# Altium PCB Motoransteuerung_v2.PcbDoc
Units mm, origin at the board's own origin, x right, y up, seen from the top; angles counter-clockwise.
Board outline 78.49 x 52.83 mm, 2 copper layers (Top Layer, Bottom Layer); 17 components, 11 nets, 48 pads, 0 vias.
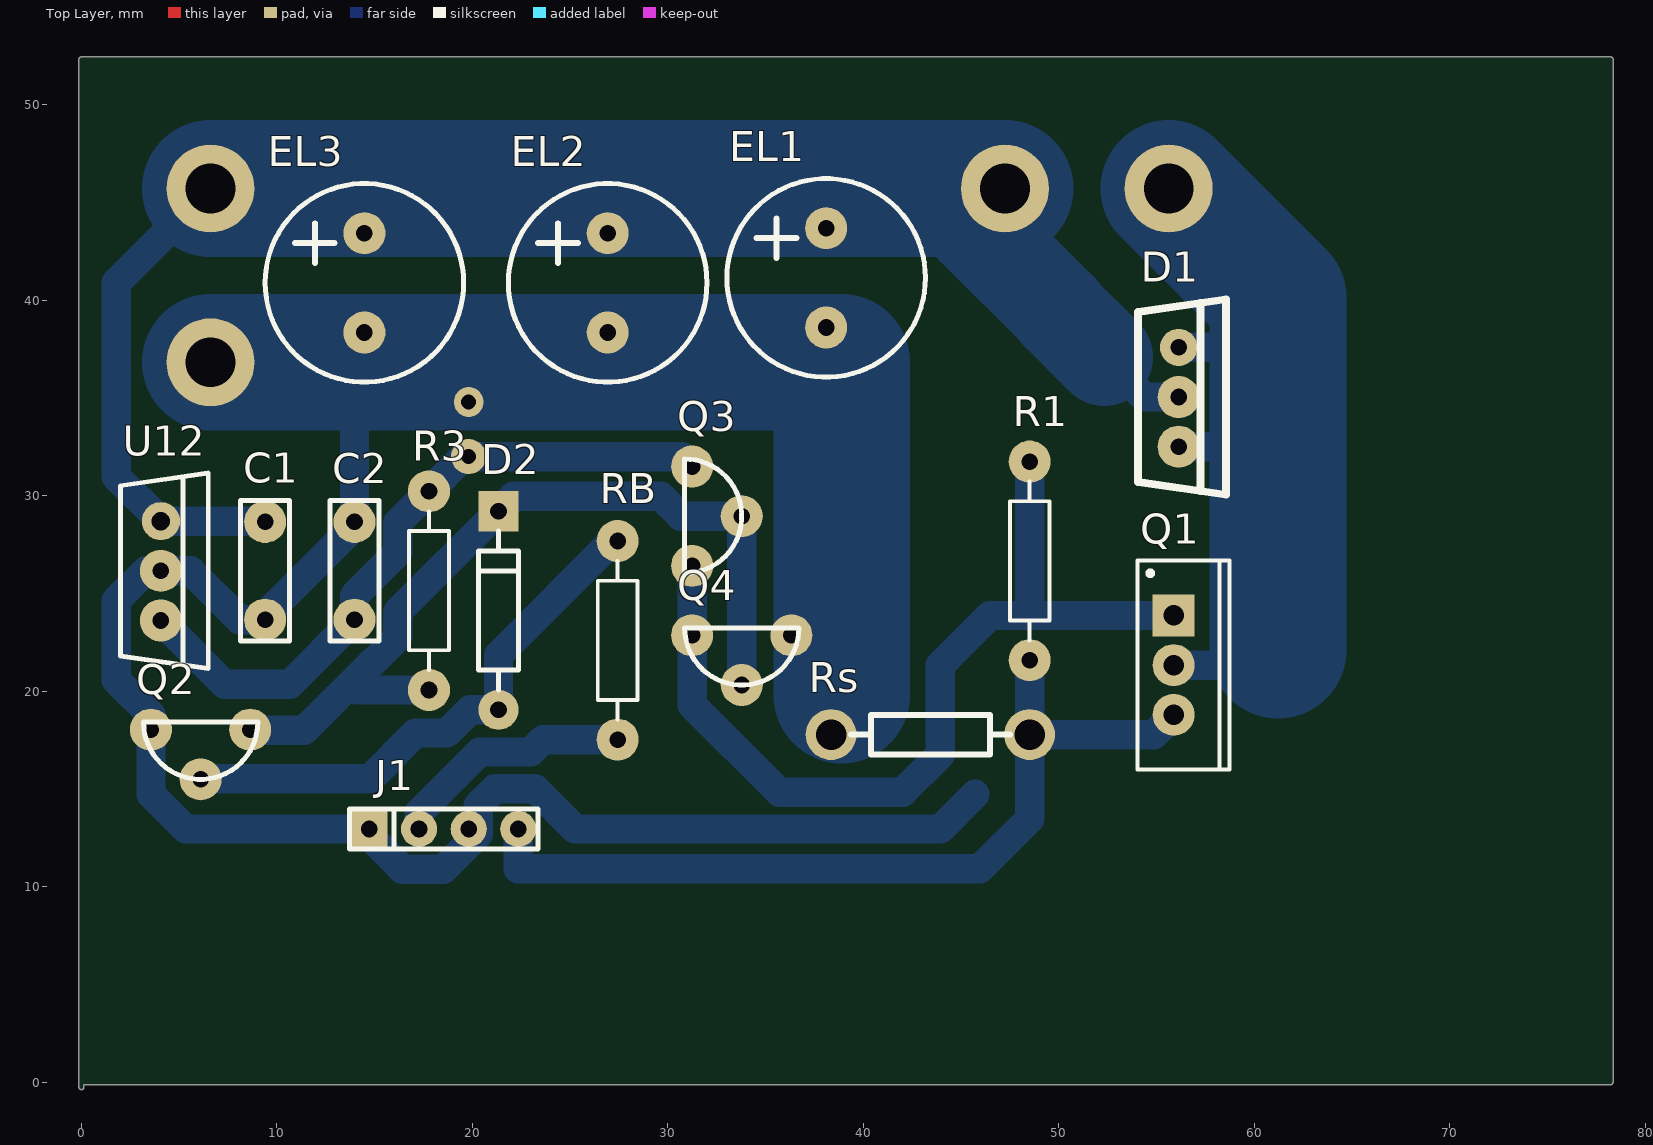
[diagram p0: Top Layer view]
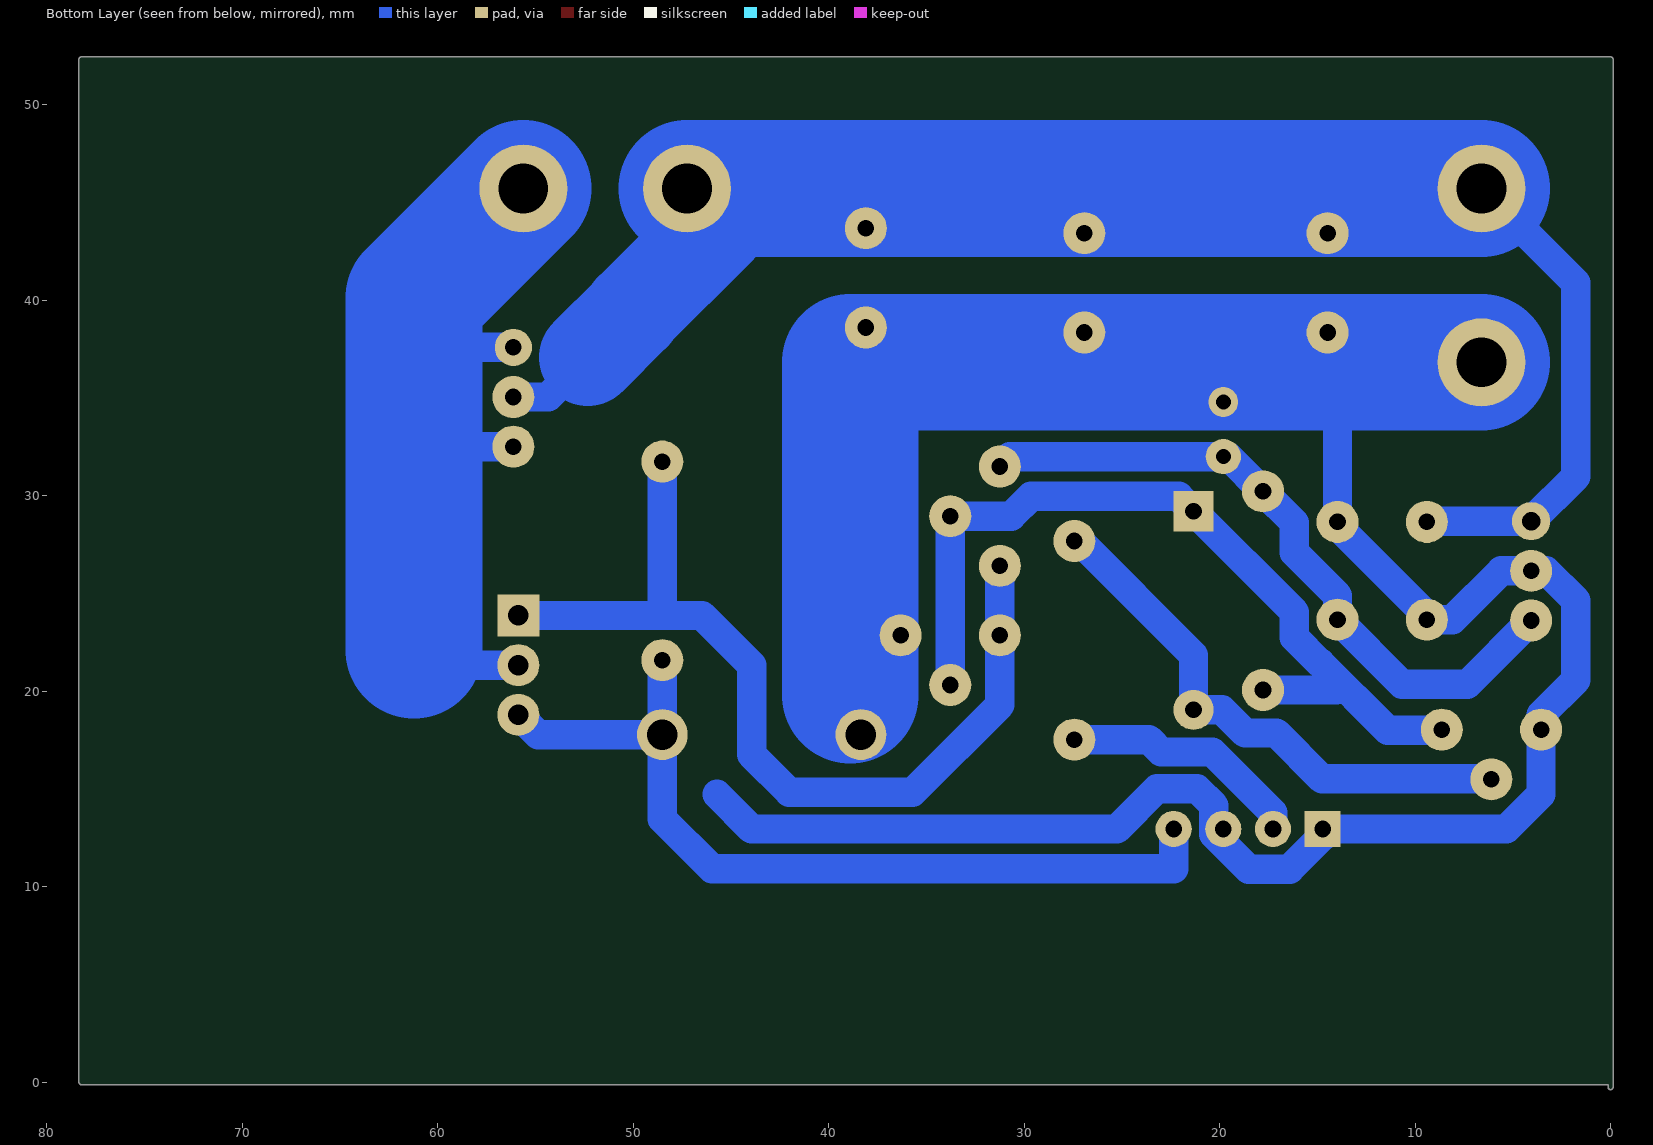
[diagram p1: Bottom Layer view, seen from below]

## Layer stack, top to bottom
Top Solder: solder mask 0.0102, Solder Resist, Dk 3.5
Top Layer: signal copper 0.0356
Dielectric1: dielectric 0.32, FR-4, Dk 4.8
Bottom Layer: signal copper 0.0356
Bottom Solder: solder mask 0.0102, Solder Resist, Dk 3.5

## Board outline
-0.127,-0.254 -0.127,52.324 cw(c0,52.324) 0,52.451 78.232,52.451 cw(c78.232,52.324) 78.359,52.324 78.359,0 cw(c78.232,0) 78.232,-0.127 0.127,-0.127 0.127,-0.254 cw(c0,-0.254)

## Design rules (kind name [scope] priority, off if disabled: settings)
Clearance Clearance_1 [Inpolygon vs Inpolygon] p1: gap=0.75 ignorepadtopadclearanceinfootprint=FALSE except(0: Arc-Hole Track-Hole SMDPad-Hole THPad-Hole Via-Hole Fill-Hole Poly-Hole Region-Hole Text-Hole)
Clearance [All] p2: gap=0.38 ignorepadtopadclearanceinfootprint=FALSE except(0: Arc-Hole Track-Hole SMDPad-Hole THPad-Hole Via-Hole Fill-Hole Poly-Hole Region-Hole Text-Hole)
HoleSize [All] p1: absolutevalues=TRUE maxlimit=2160.256 minlimit=0.75 maxpercent=80.000 minpercent=20.000
MinimumAnnularRing [All] p1: minimumring=0.5
PolygonConnect [All] p1: connectstyle=Relief reliefconductorwidth=0.5 reliefentries=4 polygonreliefangle="90 Angle" airgapwidth=0.254
RoutingVias [All] p1: holewidth=0.85 width=1.85 viastyle="Through Hole" minholewidth=0.75 minwidth=1.75 maxholewidth=0.95 maxwidth=1.95
SolderMaskExpansion [All] p1: expansion=0.102
Width [All] p1: maxlimit=10 minlimit=0.38 preferedwidth=1.5
29 further rules are at their usual default settings.

## Classes and differential pairs
component class Motoransteurung: C1 C2 D2 EL1 J1 Q2 Q3 Q4 R3 RB Rs U12

## Components (designator, comment, footprint, x,y, rotation, side; value= is the part's Value field where it differs from the comment)
C1 "KO" rad-7.2/2.5/5 9.398,26.162 r270 top value=330nF
C2 "KO" rad-7.2/2.5/5 13.97,26.162 r90 top value=100nF
D1 "Schottky" TO-220V#1 56.134,35.052 r270 top
D2 "D Schottky" DIODE-0.4/085 21.336,24.13 r90 top
EL1 "ELKO" RB-.2/.4 38.1,41.148 r90 top
EL2 "ELKO" RB-.2/.4 26.924,40.894 r90 top (schematic designator EL1)
EL3 "ELKO" RB-.2/.4 14.478,40.894 r90 top (schematic designator EL1)
J1 "CON4" Sip-4 18.542,12.954 r0 top
Q1 "IRFZ34N" TO-220AB 55.88,21.336 r270 top
Q2 "BC548" TO-92/EBC 6.096,18.034 r180 top
Q3 "BC548" TO-92/EBC 31.242,28.956 r270 top
Q4 "BC558" TO-92/EBC 33.782,22.86 r180 top
R1 "RES" Axial-0.4#1 48.514,26.67 r270 top value=100K
R3 "Res2" AXIAL-0.4 17.78,25.146 r90 top value=470
RB "Res2" AXIAL-0.4 27.432,22.606 r270 top value=220
Rs "RES" Axial-0.4#2 43.434,17.78 r0 top value=0.039
U12 "7812" TO-220V#2 4.064,26.162 r270 top

## Footprints (in the part's own frame and the unit in brackets; to place one, negate y for a bottom-side part, rotate by r counter-clockwise, add the part's x,y. Pads: shape width x height; smd on the part's side, far side on the other; paste and mask are expansions set on the pad)
Axial-0.4#1 [mm] "Axial Device, Thru-Hole; 2 Leads; 0.4 in Pin Spacing"
  round 2.15 hole 0.85: 1(-5.08,0) 2(5.08,0)
  silkscreen extent -4.06,-1.02 4.06,1.02
Axial-0.4#2 [mm]
  round 2.6 hole 1.55: 1(-5.08,0) 2(5.08,0)
  silkscreen extent -4.06,-1.02 4.06,1.02
AXIAL-0.4 [mm] "Axial Device, Thru-Hole; 2 Leads; 0.4 in Pin Spacing"
  round 2.15 hole 0.85: 1(-5.08,0) 2(5.08,0)
  silkscreen extent -4.06,-1.02 4.06,1.02
DIODE-0.4/085 [mm]
  round 2.05 hole 0.85: 1(-5.08,0)
  rect 2.05x2.05 hole 0.85: 2(5.08,0)
  silkscreen extent -4.06,-1.02 4.06,1.02
rad-7.2/2.5/5 [mm]
  round 2.15 hole 0.85: 1(-2.5,0) 2(2.5,0)
  silkscreen extent -3.6,-1.25 3.6,1.25
RB-.2/.4 [mm]
  round 2.15 hole 0.85: 1(2.54,0) 2(-2.54,0)
  silkscreen extent -5.08,-5.08 5.08,5.08
Sip-4 [mm]
  rect 1.85x1.85 hole 0.85: 1(-3.81,0)
  round 1.85 hole 0.85: 2(-1.27,0) 3(1.27,0) 4(3.81,0)
  silkscreen extent -4.83,-1.02 4.83,1.02
TO-92/EBC [mm]
  round 2.15 hole 0.85: 1(0,2.54) 2(2.54,0) 3(-2.54,0)
  silkscreen extent -2.93,-0.38 2.92,2.54
TO-220AB [mm] "TO, Thru-Hole, Vertical, Heatsink Mounted; 3 In-Line Leads; Pitch 2.54 mm"
  rect 2.15x2.15 hole 1.05: 1(-2.54,0)
  round 2.15 hole 1.05: 2(0,0) 3(2.54,0)
  silkscreen extent -5.35,-1.85 5.35,2.85, body extent -5.4,-1.9 5.4,2.9, height 19.3
TO-220V#1 [mm]
  round 1.9 hole 0.85: 1(-2.54,0)
  round 2.15 hole 0.85: 2(2.54,0) 3(0,0)
  silkscreen extent -5,-2.07 5,2.42
TO-220V#2 [mm]
  round 1.95 hole 0.95: 1(-2.54,0)
  round 2.15 hole 0.85: 2(2.54,0) 3(0,0)
  silkscreen extent -5,-2.07 5,2.42

## Part data
C1 C2: "Kondensator"
D2: "Schottky Diode", Code_JEDEC=DO-214-AA, LatestRevisionDate=17-Jul-2002, LatestRevisionNote="Re-released for DXP Platform.", PackageDescription="DO-214-AA/SMB; 2 C-Bend Leads; Body 5.3 x 3.6 mm, inc. leads (LxW)", PackageReference=SMB, Published=8-Jun-2000, Publisher="Altium Limited"
EL1 EL2 EL3: "Elko"
J1: "Stecker"
Q1: "HEXFET Power MOSFET", ComponentLink1Description="Manufacturer Link", ComponentLink1URL=http://www.irf.com/, ComponentLink2Description=Datasheet, ComponentLink2URL=http://www.irf.com/product-info/datasheets/data/irfz34n.pdf, DatasheetVersion=Aug-1997, LatestRevisionDate=17-Jul-2002, LatestRevisionNote="Re-released for DXP Platform.", Note="Pin 2 is electrically connected to pin 4.", PackageDescription="TO, Thru-Hole, Vertical, Heatsink Mounted; 3 In-Line Leads; Pitch 2.54 mm", PackageReference=TO-220AB, PackageVersion=Feb-1997, Published=8-Jun-2000, Publisher="Altium Limited"
Q2 Q3: library part NPN, "Transistor"
Q4: library part PNP, "Transistor"
R1 Rs: "Widerstand"
R3 RB: "Resistor", LatestRevisionDate=17-Jul-2002, LatestRevisionNote="Re-released for DXP Platform.", PackageDescription="Axial Device, Thru-Hole; 2 Leads; 0.4 in Pin Spacing", PackageReference=AXIAL-0.4, Published=8-Jun-2000, Publisher="Altium Limited"
U12: library part 78xx, "IC"

## Free pads (board coordinates)
  round 4.5 hole 2.55: 1(55.626,45.72) 3(6.604,45.72) 5(6.604,36.83) 6(47.244,45.72)
  round 1.8 hole 0.762: 10(19.812,32.004)
  round 1.524 hole 0.762: 11(19.812,34.798)

## Nets (pads, with @x,y where several pads share a name; then routed paths per layer and width w, separated by ;. In a path a pad name is that pad's centre, name@x,y a point inside that pad or via, vN(x,y) a via of type N, cw(c..) or ccw(c..) an arc to the next point about the centre after c; other vN are vias at no path point)
12V: C2.1 pad.10 Q3.3 R3.2 U12.2 | length 35.2
  Bottom Layer w1.5: U12.2 7.326,20.36 10.668,20.36 C2.1 13.97,24.892 16.175,27.097 16.175,28.621 R3.2 19.558,32.004 pad.10 30.734,32.004 Q3.3
24V: C1.1 D1.3 EL1.1 EL2.1 EL3.1 pad.3 pad.6 U12.1 | length 83.3
  Bottom Layer w1.5: pad.3 1.778,40.894 1.778,30.988 U12.1 9.358,28.702 C1.1 ; 47.244,42.418 pad.6 ; 52.326,37.082 54.356,35.052 D1.3
  Bottom Layer w5: 45.744,43.712 50.033,39.422 50.033,39.375 52.326,37.082
  Bottom Layer w7: pad.3 pad.6
GND: C1.2 C2.2 EL1.2 EL2.2 EL3.2 J1.1 J1.3 pad.5 pad.11 Q2.2 Q4.3 Rs.1 U12.3 | length 140
  Bottom Layer w1.5: 13.97,36.328 C2.2 13.97,28.448 9.398,23.876 C1.2 8.088,23.662 5.588,26.162 U12.3 3.302,26.162 1.778,24.638 1.778,20.574 3.556,18.796 Q2.2 3.556,14.732 5.334,12.954 J1.1@14.224,12.954 ; J1.1 14.732,12.588 16.421,10.899 18.519,10.899 20.297,12.677 20.297,14.147 21.159,15.009 23.203,15.009 25.258,12.954 43.942,12.954 45.72,14.732 ; 36.322,20.574 37.375,20.574 38.119,21.317 38.354,21.082 Rs.1 ; Q4.3 38.137,22.86 38.899,23.622
  Bottom Layer w7: pad.5 19.812,36.83 38.899,36.83 38.899,23.622 38.899,19.812
Net_1: 
NetD2_1: D2.1 Q2.1 RB.1 | length 28
  Bottom Layer w1.5: Q2.1 6.096,15.517 14.755,15.517 17.099,17.861 18.693,17.861 19.882,19.05 D2.1 21.336,21.844 RB.1@27.305,27.813
NetD2_2: D2.2 Q2.3 Q3.1 Q4.1 R3.1 | length 44
  Bottom Layer w1.5: Q2.3 8.671,17.999 11.395,17.999 14.853,21.457 14.883,21.457 16.175,22.749 16.175,24.049 D2.2 22.098,29.972 29.648,29.972 30.664,28.956 Q3.1 Q4.1 ; 13.786,20.32 14.04,20.066 R3.1
NetJ1_1: J1.2 RB.2 | length 12.5
  Bottom Layer w1.5: J1.2 17.272,13.781 20.38,16.889 22.985,16.889 23.622,17.526 RB.2
NetJ1_4: J1.4 Q1.3 R1.2 Rs.2 | length 45.2
  Bottom Layer w1.5: J1.4 22.352,10.922 45.974,10.922 48.514,13.462 Rs.2 ; R1.2 Rs.2 ; Q1.3 54.864,17.78 Rs.2
NetL1_1: 
ugs: Q1.1 Q3.2 Q4.2 R1.1 | length 47.9
  Bottom Layer w1.5: Q3.2 Q4.2 31.242,19.304 35.712,14.834 42.012,14.834 43.942,16.764 43.942,21.336 46.482,23.876 48.514,23.876 ; R1.1 48.514,23.876 ; Q1.1 48.514,23.876
uq: D1.1 D1.2 pad.1 Q1.2 | length 42.8
  Bottom Layer w1.5: Q1.2 60.452,21.336 61.214,22.098 ; D1.2 61.214,32.512 ; D1.1 58.674,37.592 61.214,40.132
  Bottom Layer w7: pad.1 61.214,40.132 61.214,32.512 61.214,22.098